# Altium PCB TIMER_COUNTER_MAIN.PcbDoc
Units mm, origin at the board's own origin, x right, y up, seen from the top; angles counter-clockwise.
Board outline 50 x 50 mm, 2 copper layers (Top Layer, Bottom Layer); 63 components, 52 nets, 194 pads, 122 vias.
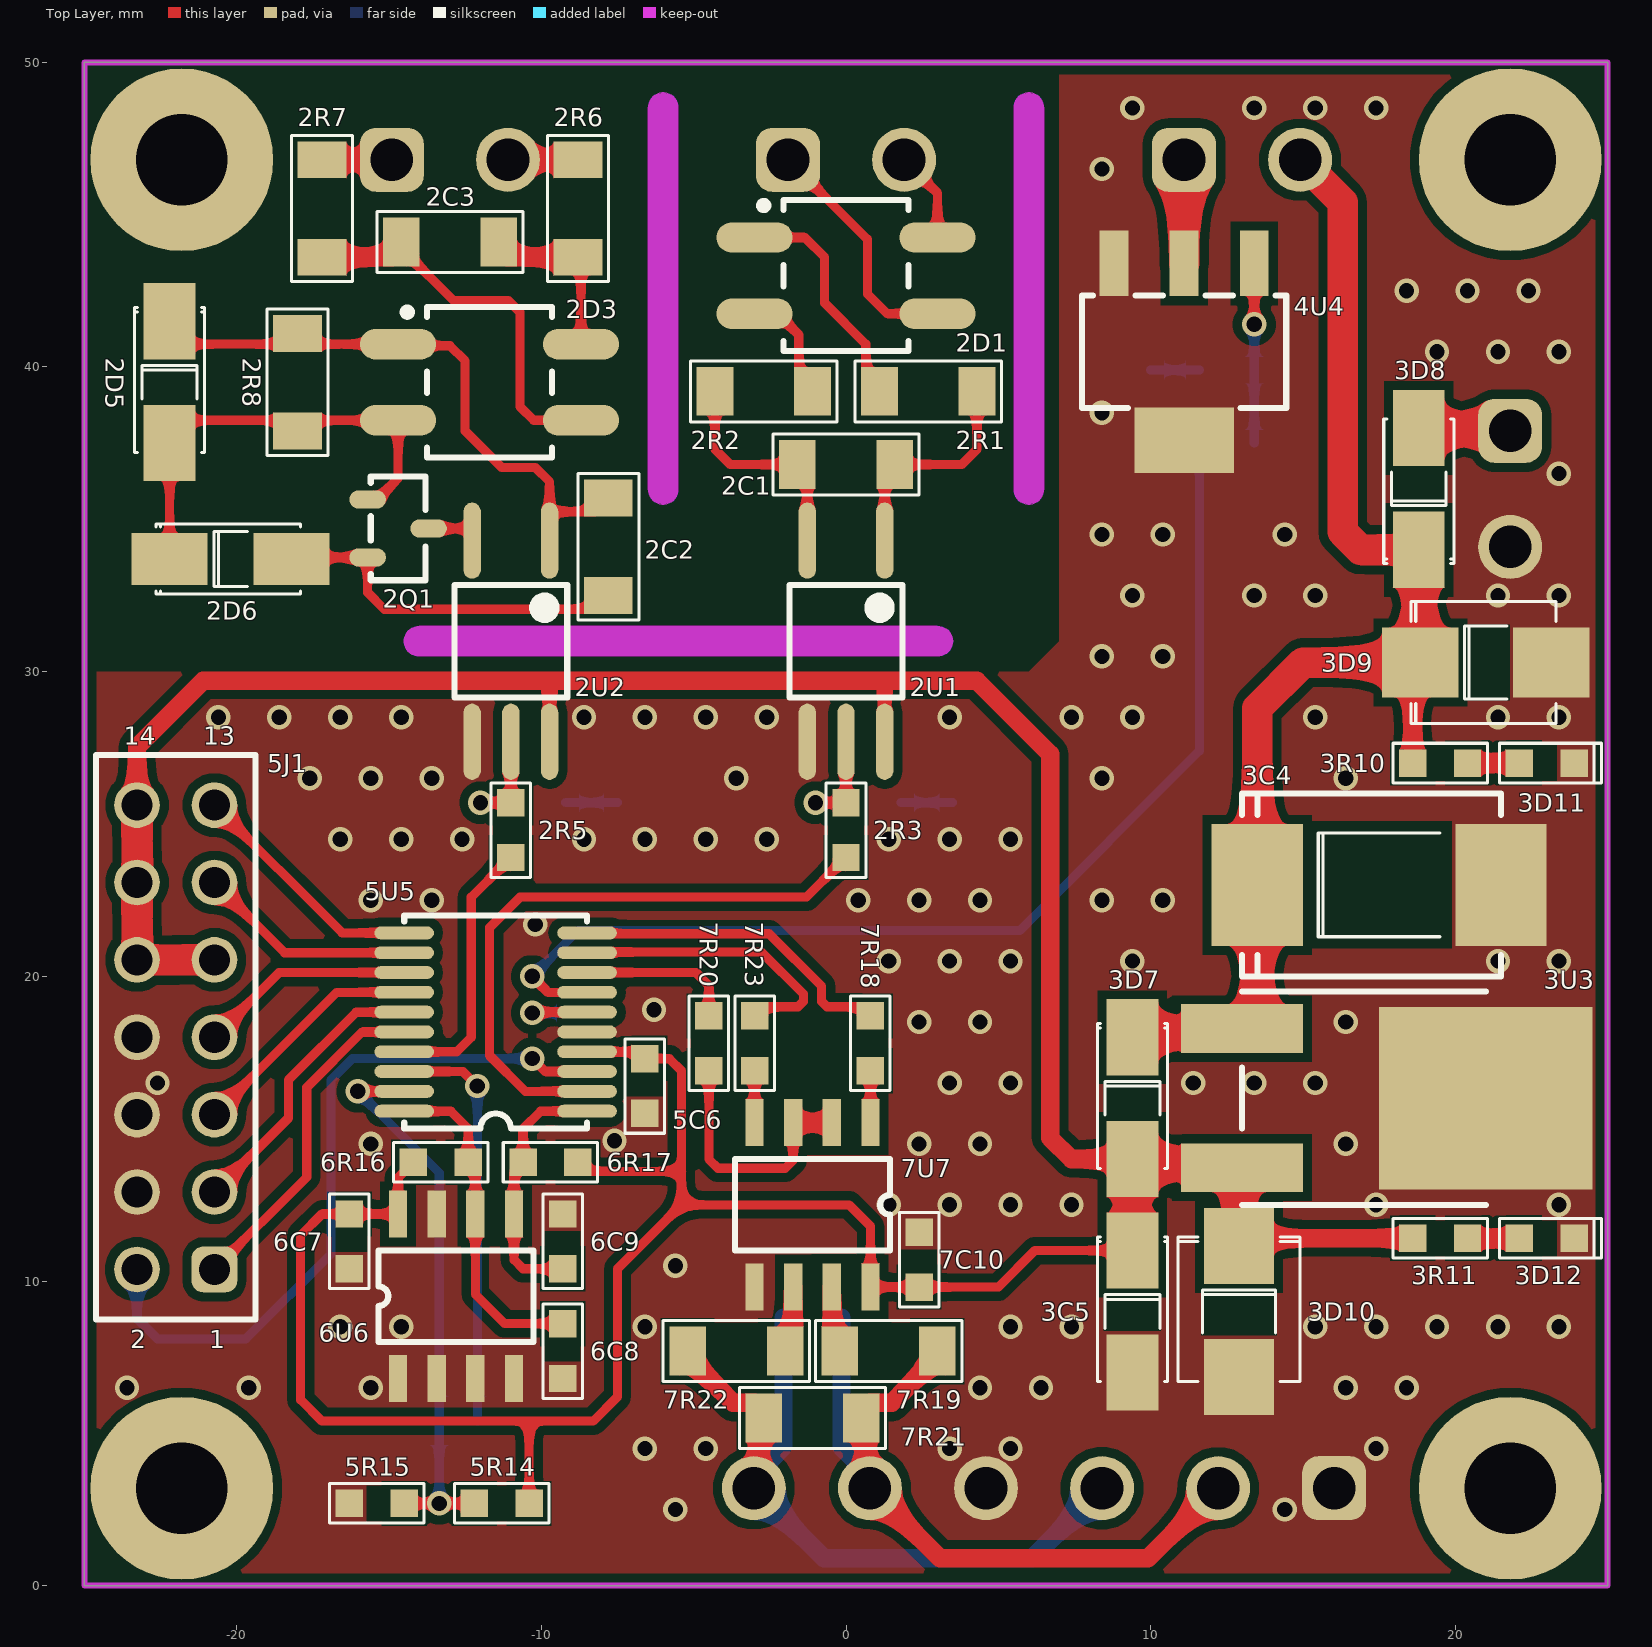
[diagram p0: Top Layer view]
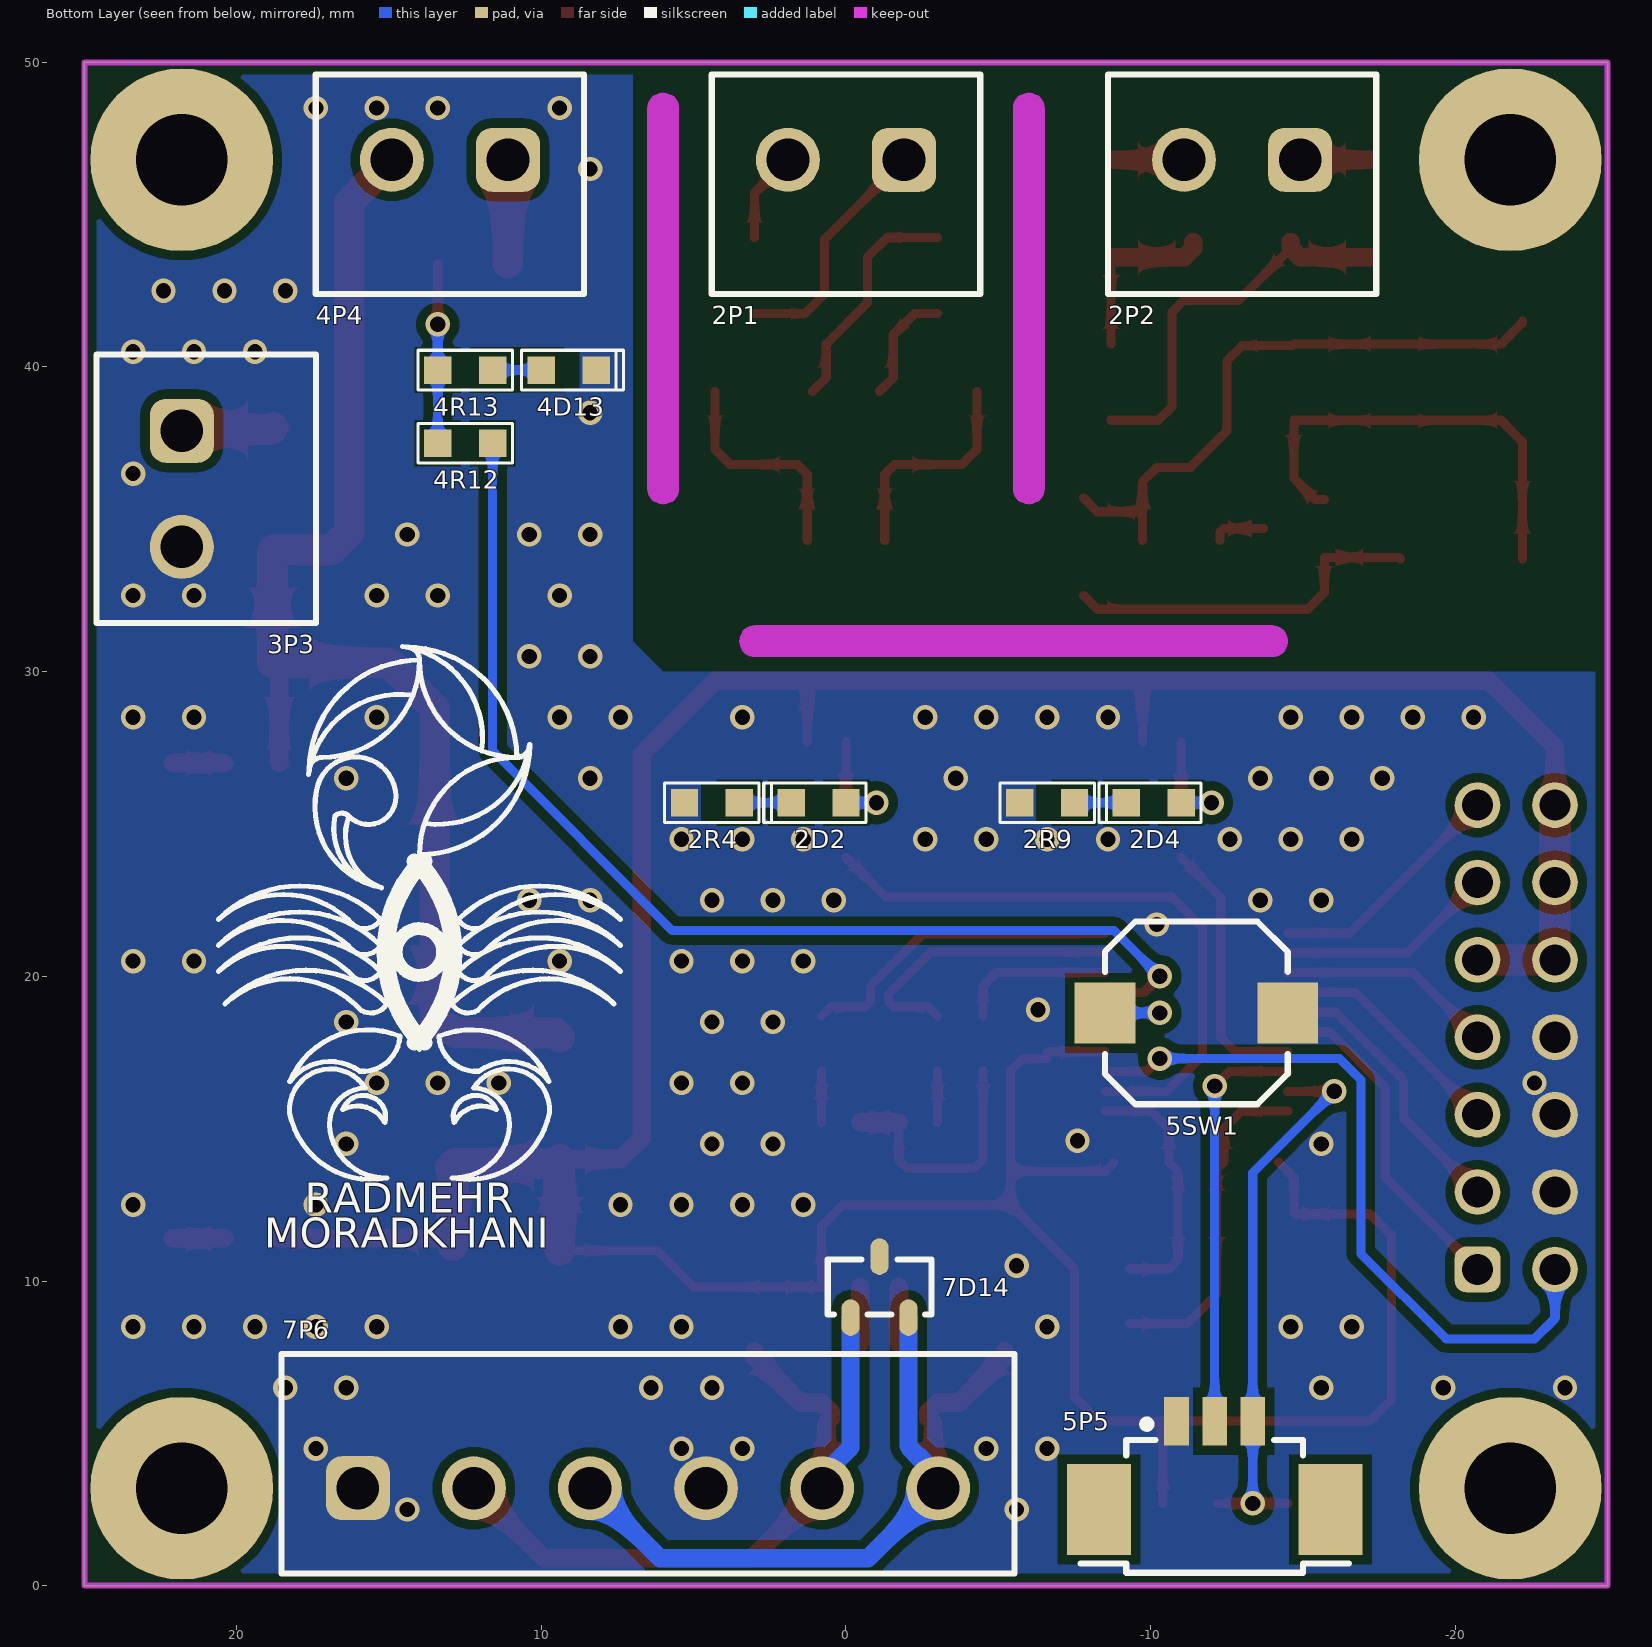
[diagram p1: Bottom Layer view, seen from below]
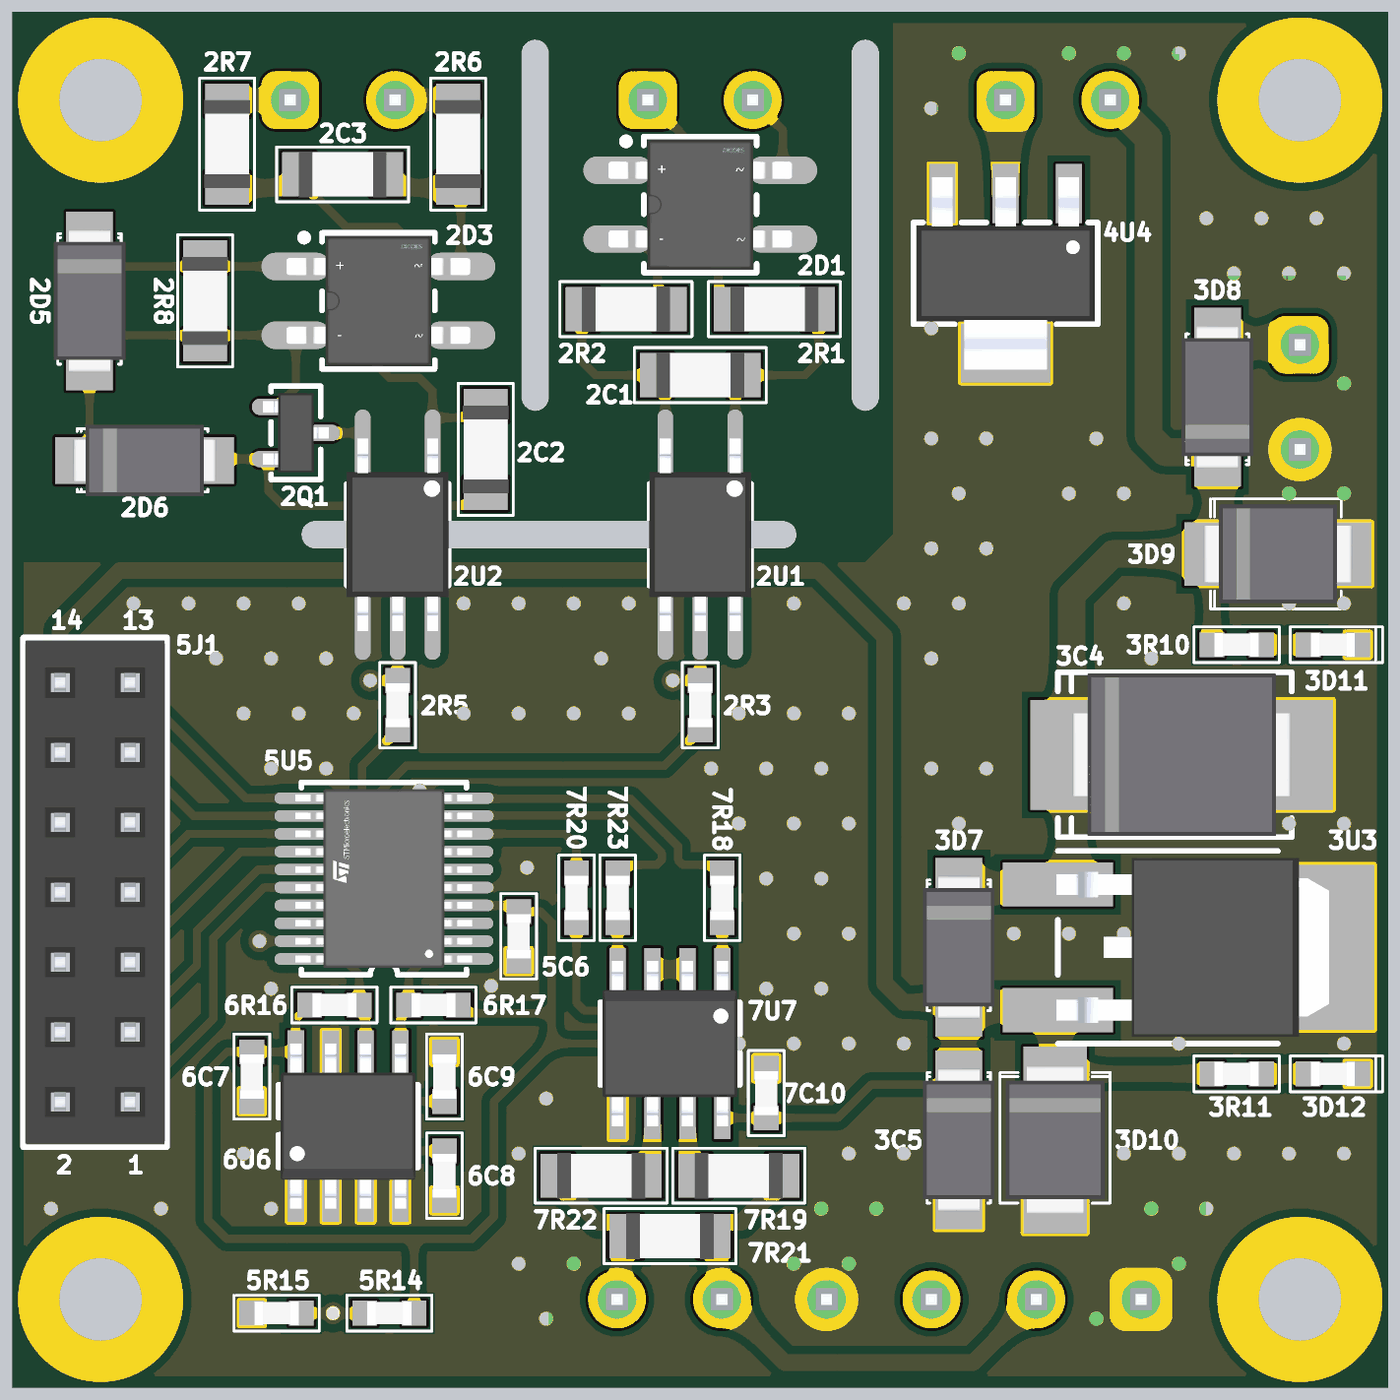
[diagram p2: 3D render of the assembled board from above, using the file's embedded part models]
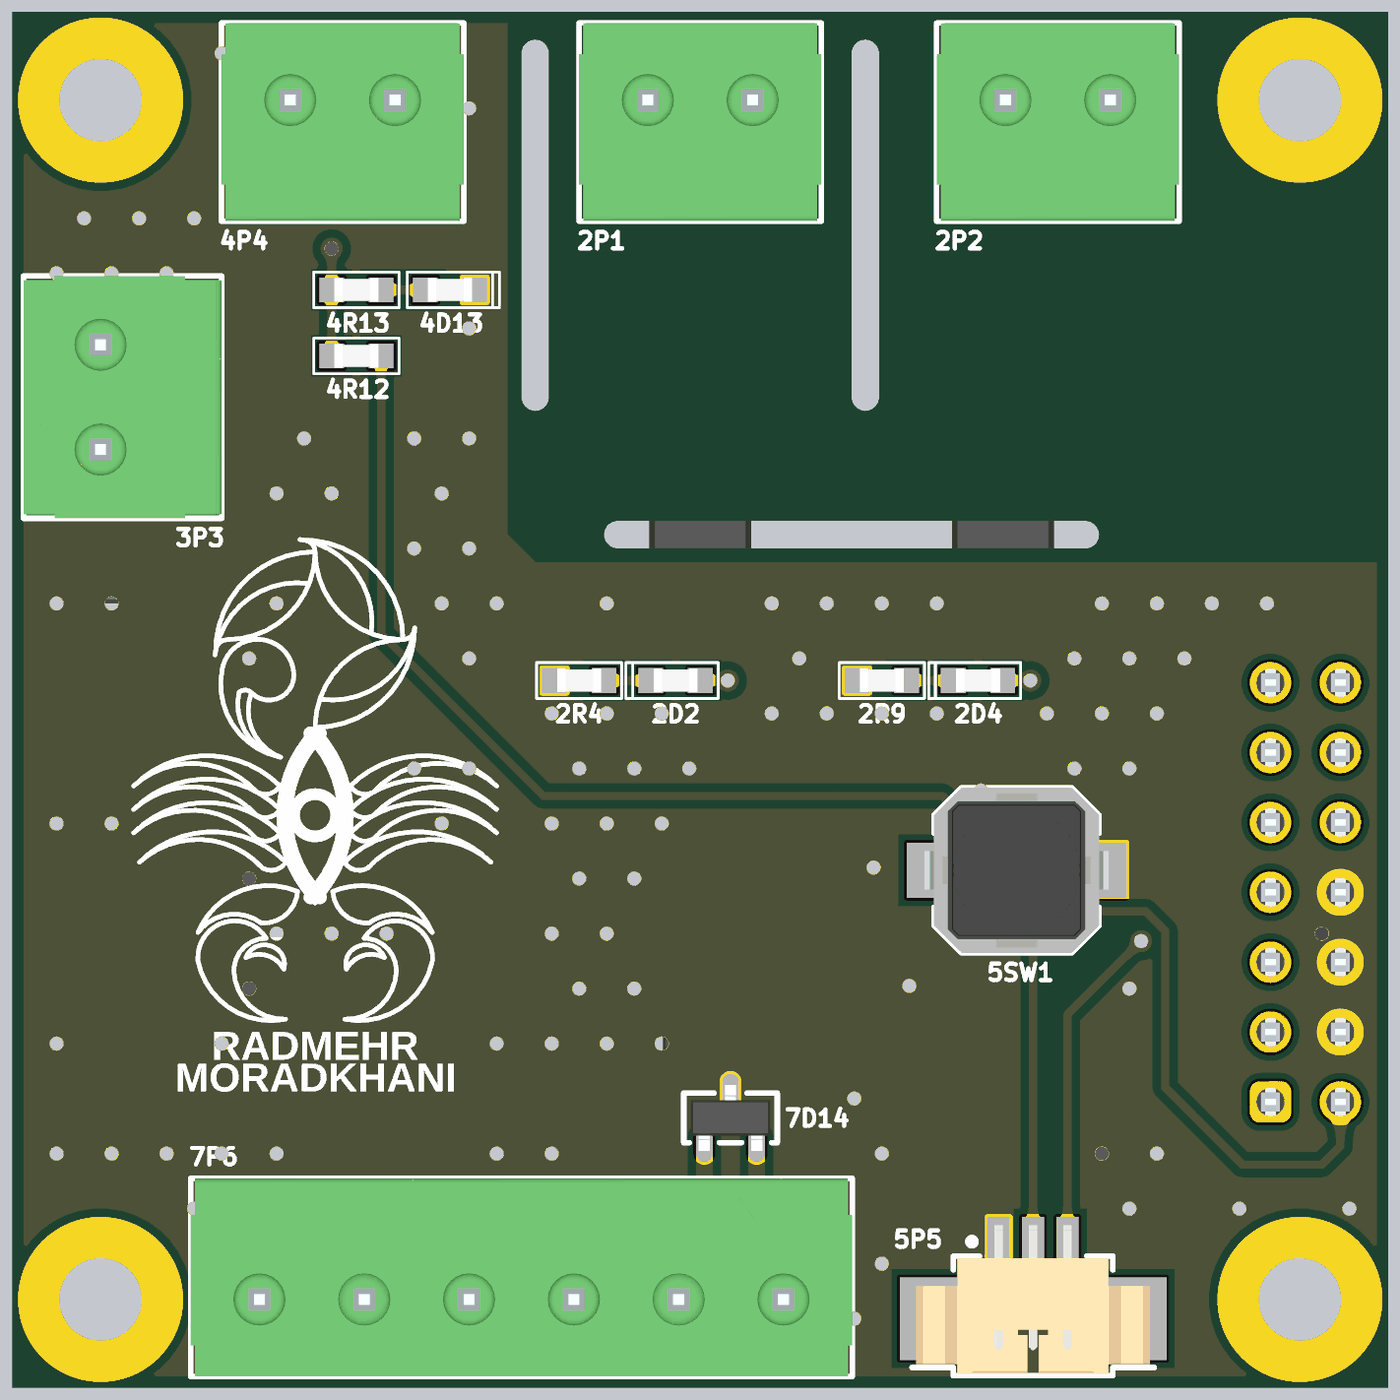
[diagram p3: 3D render of the assembled board from below, using the file's embedded part models]

## Layer stack, top to bottom
Top Solder: solder mask 0.0102, Solder Resist, Dk 3.5
Top Layer: signal copper 0.0356
Dielectric 1: dielectric 0.32, FR-4, Dk 4.8
Bottom Layer: signal copper 0.0356
Bottom Solder: solder mask 0.0102, Solder Resist, Dk 3.5

## Board outline
-25,0 -25,50 25,50 25,0
cut-out: 5.5,36 ccw(c6,36) 6.5,36 6.5,48.5 ccw(c6,48.5) 5.5,48.5
cut-out: -6.5,36 ccw(c-6,36) -5.5,36 -5.5,48.5 ccw(c-6,48.5) -6.5,48.5
cut-out: -14,30.5 cw(c-14,31) -14,31.5 3,31.5 cw(c3,31) 3.5,31 cw(c3,31) 3,30.5

## Design rules (kind name [scope] priority, off if disabled: settings)
Clearance [All] p1: gap=0.3 ignorepadtopadclearanceinfootprint=FALSE except(0: Arc-Hole Track-Hole SMDPad-Hole THPad-Hole Via-Hole Fill-Hole Poly-Hole Region-Hole Text-Hole)
DiffPairsRouting [All] p1: maxlimit=0.3 minlimit=0.3 mostfreqgap=0.3 toplayer_minwidth=0.3 toplayer_maxwidth=0.3 toplayer_prefwidth=0.3 bottomlayer_minwidth=0.3 bottomlayer_maxwidth=0.3 bottomlayer_prefwidth=0.3 maxuncoupledlength=12.7
PlaneClearance [All] p1: clearance=0.5
PlaneConnect [All] p1: planeconnectstyle=Direct reliefexpansion=0.5 reliefentries=4 reliefconductorwidth=0.3 reliefairgap=0.3
PolygonConnect [All] p1: connectstyle=Direct reliefconductorwidth=0.254 reliefentries=4 polygonreliefangle="90 Angle" airgapwidth=0.254
RoomDefinition SSR [InComponentClass('SSR')] p1: confinementstyle=ConfineIn formatcopy=TRUE lockcomponents=FALSE outline -109.6,-53.5 -58.8,-53.5 -58.8,-28.1 -109.6,-28.1
RoomDefinition RS485 [InComponentClass('RS485')] p2: confinementstyle=ConfineIn formatcopy=TRUE lockcomponents=FALSE outline -109.6,-53.5 -58.8,-53.5 -58.8,-28.1 -109.6,-28.1
RoomDefinition POWER_SUPPLY [InComponentClass('POWER_SUPPLY')] p3: confinementstyle=ConfineIn formatcopy=TRUE lockcomponents=FALSE outline -109.6,-53.5 -58.8,-53.5 -58.8,-28.1 -109.6,-28.1
RoomDefinition MCU [InComponentClass('MCU')] p4: confinementstyle=ConfineIn formatcopy=TRUE lockcomponents=FALSE outline -109.6,-53.5 -58.8,-53.5 -58.8,-28.1 -109.6,-28.1
RoomDefinition ISO [InComponentClass('ISO')] p5: confinementstyle=ConfineIn formatcopy=TRUE lockcomponents=FALSE outline -109.6,-53.5 -58.8,-53.5 -58.8,-28.1 -109.6,-28.1
RoomDefinition EEP [InComponentClass('EEP')] p6: confinementstyle=ConfineIn formatcopy=TRUE lockcomponents=FALSE outline -109.6,-53.5 -58.8,-53.5 -58.8,-28.1 -109.6,-28.1
RoutingVias [All] p1: holewidth=0.5 width=0.8 viastyle="Through Hole" minholewidth=0.5 minwidth=0.8 maxholewidth=0.5 maxwidth=0.8
SolderMaskExpansion [All] p1: expansion=0.102 istentingtop=FALSE
Width [All] p1: maxlimit=1 minlimit=0.3 preferedwidth=0.6
27 further rules are at their usual default settings.

## Classes and differential pairs
component class SSR: 4D13 4P4 4R12 4R13 4U4
component class RS485: 7C10 7D14 7P6 7R18 7R19 7R20 7R21 7R22 7R23 7U7
component class POWER_SUPPLY: 3C4 3C5 3D7 3D8 3D9 3D10 3D11 3D12 3P3 3R10 3R11 3U3
component class ISO: 2C1 2C2 2C3 2D1 2D2 2D3 2D4 2D5 2D6 2P1 2P2 2Q1 2R1 2R2 2R3 2R4 2R5 2R6 2R7 2R8 2R9 2U1 2U2
component class EEP: 6C7 6C8 6C9 6R16 6R17 6U6
component class MCU: 5C6 5J1 5P5 5R14 5R15 5SW1 5U5
differential pair USRT: +USRT_P -USRT_N

## Components (designator, comment, footprint, x,y, rotation, side; value= is the part's Value field where it differs from the comment)
2C1 "CAP_SMD" "C 1206" 0,36.8 r0 top (schematic designator C1)
2C2 "CAP_SMD" "C 1206" -7.8,34.1 r270 top (schematic designator C2)
2C3 "CAP_SMD" "C 1206" -13,44.1 r0 top (schematic designator C3)
2D1 "MB10F" MBF 0,43 r0 top (schematic designator D1)
2D2 "LED_SMD" "D 0603" 0.9,25.7 r0 bottom (schematic designator D2)
2D3 "MB10F" MBF -11.7,39.5 r0 top (schematic designator D3)
2D4 "LED_SMD" "D 0603" -10.1,25.7 r0 bottom (schematic designator D4)
2D5 "DIOD_SMD_ZENER" DIOD_SMA -22.2,39.5 r90 top (schematic designator D5)
2D6 "DIOD_SMD" DIOD_SMA -20.2,33.7 r180 top (schematic designator D6)
2P1 "691321300002" 691321300002 0,46 r0 bottom (schematic designator P1)
2P2 "691321300002" 691321300002 -13,46 r0 bottom (schematic designator P2)
2Q1 "BC817" SOT-23_3_Q -14.7,34.7 r0 top (schematic designator Q1)
2R1 "RES_SMD" "R 1206" 2.7,39.2 r0 top (schematic designator R1)
2R2 "RES_SMD" "R 1206" -2.7,39.2 r180 top (schematic designator R2)
2R3 "RES_SMD" "R 0603" 0,24.8 r90 top (schematic designator R3)
2R4 "RES_SMD" "R 0603" 4.4,25.7 r180 bottom (schematic designator R4)
2R5 "RES_SMD" "R 0603" -11,24.8 r90 top (schematic designator R5)
2R6 "RES_SMD" "R 1206" -8.8,45.2 r270 top (schematic designator R6)
2R7 "RES_SMD" "R 1206" -17.2,45.2 r270 top (schematic designator R7)
2R8 "RES_SMD" "R 1206" -18,39.5 r90 top (schematic designator R8)
2R9 "RES_SMD" "R 0603" -6.6,25.7 r180 bottom (schematic designator R9)
2U1 "TLP2355" SOIC-6-5 0,31 r270 top (schematic designator U1)
2U2 "TLP2355" SOIC-6-5 -11,31 r270 top (schematic designator U2)
3C4 "CAP_POL" CAP_SMC 17.5,23 r180 top (schematic designator C4)
3C5 "CAP_POL" CAP_SMA 9.4,9 r90 top (schematic designator C5)
3D7 "DIOD_SMD" DIOD_SMA 9.4,16 r90 top (schematic designator D7)
3D8 "DIOD_SMD" DIOD_SMA 18.8,36 r270 top (schematic designator D8)
3D9 "TVS_BI" DIOD_SMB 21,30.3 r180 top (schematic designator D9)
3D10 "TVS_BI" DIOD_SMB 12.9,9 r90 top (schematic designator D10)
3D11 "LED_SMD" "D 0603" 23,27 r0 top (schematic designator D11)
3D12 "LED_SMD" "D 0603" 23,11.4 r0 top (schematic designator D12)
3P3 "691321300002" 691321300002 21,36 r270 bottom (schematic designator P3)
3R10 "RES_SMD" "R 0603" 19.5,27 r180 top (schematic designator R10)
3R11 "RES_SMD" "R 0603" 19.5,11.4 r180 top (schematic designator R11)
3U3 "BD3570FP-E2" DPAK-U 17,16 r180 top (schematic designator U3)
4D13 "LED_SMD" "D 0603" 9.1,39.9 r180 bottom (schematic designator D13)
4P4 "691321300002" 691321300002 13,46 r0 bottom (schematic designator P4)
4R12 "RES_SMD" "R 0603" 12.5,37.5 r180 bottom (schematic designator R12)
4R13 "RES_SMD" "R 0603" 12.5,39.9 r0 bottom (schematic designator R13)
4U4 "BSP75N" "SOT-223 - BSP75N" 11.1,40.5 r180 top (schematic designator U4)
5C6 "CAP_SMD" "C 0603" -6.6,16.4 r90 top (schematic designator C6)
5J1 "61301421821" 61301421821 -22,18 r90 top locked (schematic designator J1)
5P5 "653103131822" 653103131822 -12.1,2.6 r180 bottom (schematic designator P5)
5R14 "RES_SMD" "R 0603" -11.3,2.7 r0 top (schematic designator R14)
5R15 "RES_SMD" "R 0603" -15.4,2.7 r0 top (schematic designator R15)
5SW1 "430133050816" WS-TASV_L6W6H5_4301330508x6 -11.5,18.8 r0 bottom (schematic designator SW1)
5U5 "STM32G030F6" TSSOP-20 -11.5,18.5 r180 top (schematic designator U5)
6C7 "CAP_SMD" "C 0603" -16.3,11.3 r90 top (schematic designator C7)
6C8 "CAP_SMD" "C 0603" -9.3,7.7 r90 top (schematic designator C8)
6C9 "CAP_SMD" "C 0603" -9.3,11.3 r270 top (schematic designator C9)
6R16 "RES_SMD" "R 0603" -13.3,13.9 r180 top (schematic designator R16)
6R17 "RES_SMD" "R 0603" -9.7,13.9 r0 top (schematic designator R17)
6U6 "AT24CXX" SOIC-8 -12.8,9.5 r90 top (schematic designator U6)
7C10 "CAP_SMD" "C 0603" 2.4,10.7 r270 top (schematic designator C10)
7D14 "SM712" SOT-23_3_D -1.1,9.8 r90 bottom (schematic designator D14)
7P6 "691321300006" 691321300006 6.5,4 r180 bottom (schematic designator P6)
7R18 "RES_SMD" "R 0603" 0.8,17.8 r270 top (schematic designator R18)
7R19 "10R" "R 1206" 1.4,7.7 r0 top (schematic designator R19)
7R20 "RES_SMD" "R 0603" -4.5,17.8 r270 top (schematic designator R20)
7R21 "120R" "R 1206" -1.1,5.5 r180 top (schematic designator R21)
7R22 "10R" "R 1206" -3.6,7.7 r180 top (schematic designator R22)
7R23 "RES_SMD" "R 0603" -3,17.8 r270 top (schematic designator R23)
7U7 "ADM3485" SOIC-8 -1.1,12.5 r270 top (schematic designator U7)

## Footprints (in the part's own frame and the unit in brackets; to place one, negate y for a bottom-side part, rotate by r counter-clockwise, add the part's x,y. Pads: shape width x height; smd on the part's side, far side on the other; paste and mask are expansions set on the pad)
61301421821 [mm] "Socket Header, Pitch 2.54 mm, THT, Vertical, dual row, 14p"
  rrect50% 1.5x1.5 hole 1.02: 1(-7.62,-1.27)
  round 1.5 hole 1.02: 2(-7.62,1.27) 3(-5.08,-1.27) 4(-5.08,1.27) 5(-2.54,-1.27) 6(-2.54,1.27) 7(0,-1.27) 8(0,1.27) 9(2.54,-1.27) 10(2.54,1.27) 11(5.08,-1.27) 12(5.08,1.27) 13(7.62,-1.27) 14(7.62,1.27)
  silkscreen extent -9.27,-2.62 9.27,2.62, body extent -9.14,-2.54 9.14,2.54, height 8.45
653103131822 [mm] "1.25mm SMT Male Horizontal Shrouded Header, 3p"
  rect 0.81x1.6 smd: 1(-1.25,2.8) 2(0,2.8) 3(1.25,2.8)
  rect 2.1x3 smd: MP1(-3.8,-0.1) MP2(3.8,-0.1)
  silkscreen extent -4.4,-2.17 4.4,2.82, body extent -4.25,-2.1 4.25,3.3, height 3.4
691321300002 [mm] "Vertical PCB Header, pitch 3.81mm, 02p"
  rrect50% 2.1x2.1 hole 1.4: 1(-1.905,-0.8)
  round 2.1 hole 1.4: 2(1.905,-0.8)
  silkscreen extent -4.4,-3.6 4.41,3.6, body extent -4.4,-3.6 4.41,3.6, height 9.25
691321300006 [mm] "Vertical PCB Header, pitch 3.81mm, 06p"
  rrect50% 2.1x2.1 hole 1.4: 1(-9.525,-0.8)
  round 2.1 hole 1.4: 2(-5.715,-0.8) 3(-1.905,-0.8) 4(1.905,-0.8) 5(5.715,-0.8) 6(9.525,-0.8)
  silkscreen extent -12.02,-3.6 12.03,3.6, body extent -12.02,-3.6 12.03,3.6, height 9.25
"C 0603" [mm] "C?"
  rect 0.9x0.9 smd: 1(-0.9,0) 2(0.9,0)
  Top Layer pour cut-out: -0.35,0.6 0.35,0.6 0.35,-0.6 -0.35,-0.6
  silkscreen extent -1.55,-0.65 1.55,0.65, body extent -0.8,-0.43 0.8,0.43, height 0.52
"C 1206" [mm] "C?"
  rect 1.2x1.6 smd: 1(-1.6,0) 2(1.6,0)
  Top Layer pour cut-out: -0.9,0.95 0.9,0.95 0.9,-0.95 -0.9,-0.95
  silkscreen extent -2.4,-1 2.4,1, body extent -1.6,-0.83 1.6,0.83, height 0.57
CAP_SMA [mm] "C?"
  rect 2.5x1.7 smd: 1(-2,0) 2(2,0)
  Top Layer pour cut-out: -0.65,0.95 0.65,0.95 0.65,-0.95 -0.65,-0.95
  silkscreen extent -2.3,-1.15 2.45,1.15, body extent -2.6,-1.3 2.6,1.3, height 2.42
CAP_SMC [mm] "C?"
  rect 3x4 smd: 1(-4,0) 2(4,0)
  Top Layer pour cut-out: -2.4,2.1 2.4,2.1 2.4,-2.1 -2.4,-2.1
  silkscreen extent -4,-3 4.5,3, body extent -3.97,-2.95 3.98,2.95, height 2.32
"D 0603" [mm] "D?"
  rect 0.9x0.9 smd: 1(-0.9,0) 2(0.9,0)
  Top Layer pour cut-out: -0.35,0.6 0.35,0.6 0.35,-0.6 -0.35,-0.6
  silkscreen extent -1.55,-0.65 1.8,0.65, body extent -0.8,-0.43 0.8,0.43, height 0.52
DIOD_SMA [mm] "D?"
  rect 2.5x1.7 smd: 1(-2,0) 2(2,0)
  Top Layer pour cut-out: -0.65,0.95 0.65,0.95 0.65,-0.95 -0.65,-0.95
  silkscreen extent -2.3,-1.15 2.45,1.15, body extent -2.6,-1.3 2.6,1.3, height 2.42
DIOD_SMB [mm] "D?"
  rect 2.5x2.3 smd: 1(-2.15,0) 2(2.15,0)
  Top Layer pour cut-out: -0.8,1.25 0.8,1.25 0.8,-1.25 -0.8,-1.25
  silkscreen extent -2.3,-2 2.45,2, body extent -2.7,-1.8 2.7,1.8, height 2.32
DPAK-U [mm] "U?"
  rect 4x1.6 smd: 1(4,-2.285) 3(4,2.285)
  rect 7x6 smd: 2(-4,0)
  silkscreen extent -4,-3.5 4,3.5, body extent -5.85,-3.25 4.05,3.25, height 2.51
MBF [mm] "D?"
  oval 2.5x1 smd paste+0 mask+0: 1(-3,1.25) 2(-3,-1.25) 3(3,-1.25) 4(3,1.25)
  silkscreen extent -2.82,-2.47 2.05,2.47, body extent -3.35,-2.36 3.35,2.36, height 1.8
"R 0603" [mm] "R?"
  rect 0.9x0.9 smd: 1(-0.9,0) 2(0.9,0)
  Top Layer pour cut-out: -0.35,0.6 0.35,0.6 0.35,-0.6 -0.35,-0.6
  silkscreen extent -1.55,-0.65 1.55,0.65, body extent -0.8,-0.43 0.8,0.43, height 0.52
"R 1206" [mm] "R?"
  rect 1.2x1.6 smd: 1(-1.6,0) 2(1.6,0)
  Top Layer pour cut-out: -0.9,0.95 0.9,0.95 0.9,-0.95 -0.9,-0.95
  silkscreen extent -2.4,-1 2.4,1, body extent -1.6,-0.83 1.6,0.83, height 0.57
SOIC-6-5 [mm] "U?"
  oval 2.5x0.571 smd paste+0 mask+0: 1(-3.3,1.27)
  rrect100% 2.5x0.571 smd paste+0 mask+0: 3(-3.3,-1.27) 4(3.3,-1.27) 5(3.3,0) 6(3.3,1.27)
  silkscreen extent -1.85,-1.85 1.85,1.85, body extent -3.5,-1.85 3.5,1.85, height 2.31
SOIC-8 [mm] "U?"
  rect 1.55x0.6 smd: 1(-2.7,1.905) 2(-2.7,0.635) 3(-2.7,-0.635) 4(-2.7,-1.905) 5(2.7,-1.905) 6(2.7,-0.635) 7(2.7,0.635) 8(2.7,1.905)
  silkscreen extent -1.5,-2.54 1.5,2.54, body extent -3,-2.45 3,2.45, height 1.75
SOT-23_3_D [mm] "D?"
  oval 1.2x0.6 smd: 1(-1,0.95) 2(-1,-0.95) 3(1,0)
  silkscreen extent -0.9,-1.7 0.9,1.7, body extent -1.2,-1.45 1.2,1.45, height 1.16
SOT-23_3_Q [mm] "Q?"
  oval 1.2x0.6 smd: 1(-1,0.95) 2(-1,-0.95) 3(1,0)
  silkscreen extent -0.9,-1.7 0.9,1.7, body extent -1.2,-1.45 1.2,1.45, height 1.16
"SOT-223 - BSP75N" [mm] "U?"
  rect 0.95x2.15 smd: 1(-2.3,-2.9) 2(0,-2.9) 3(2.3,-2.9)
  rect 3.255x2.15 smd: 3(0,2.9)
  silkscreen extent -3.35,-1.85 3.35,1.85, body extent -3.25,-3.5 3.25,3.5, height 1.8
TSSOP-20 [mm] "U?"
  oval 1.955x0.421 smd paste+0 mask+0.01: 1(-3,2.925) 2(-3,2.275) 3(-3,1.625) 4(-3,0.975) 5(-3,0.325) 6(-3,-0.325) 7(-3,-0.975) 8(-3,-1.625) 9(-3,-2.275) 10(-3,-2.925)
  oval 1.955x0.421 smd paste+0 mask+0: 11(3,-2.925) 12(3,-2.275) 13(3,-1.625) 14(3,-0.975) 15(3,-0.325) 16(3,0.325) 17(3,0.975) 18(3,1.625) 19(3,2.275) 20(3,2.925)
  silkscreen extent -3,-3.5 3,3.5, body extent -4.35,-3.75 4.35,3.75, height 0.25
WS-TASV_L6W6H5_4301330508x6 [mm] "Tact Switch, SMT, body 6x6mm"
  rect 2x2 smd: 1(-3,0) 2(3,0)
  silkscreen extent -3,-3 3,3, body extent -3.35,-3 3.35,3, height 5

## Part data
2P1 2P2 3P3 4P4: "WR-TBL Series 321 Vertical PCB Header, Through Hole, pitch 3.81mm, 2p", Manufacturer="Wurth Elektronik", Operating Temperature Max=105°C, Operating Temperature Min=-40°C, Rated Current=10A, Working Voltage=300V, Application=Pluggable, Category="Terminal Blocks", ComponentLink1Description="Manufacturer Link", ComponentLink1URL=https://www.we-online.com/redexpert/article/691321300002?ad, ComponentLink2Description=Datasheet, ComponentLink2URL=https://www.we-online.com/redexpert/spec/691321300002?ad, Manufacturer Part Number=691321300002, Match Code=WR-TBL, Modularity=No, Mount="Through Hole", Orientation=Vertical, Packaging=Box, PCB/Cable/Panel=PCB, Pin Number=2, Pitch=3.81mm
3D9 3D10: library part DIOD_SMD_TVS_BI
5J1: "WR-PHD Socket Header, THT, pitch 2.54mm, Dual Row, Vertical, 14p", Contact Resistance=20mOhm, Manufacturer="Wurth Elektronik", Operating Temperature="-40 to +125degC", Rated Current=3A, Withstanding Voltage=500VAC, Working Voltage=250VAC, ComponentLink1Description=Manufacturer, ComponentLink1URL=http://www.we-online.de, ComponentLink2Description=Datasheet, ComponentLink2URL=https://www.we-online.com/catalog/datasheet/61301421821.pdf, Gender="Socket Header", Manufacturer Part Number=61301421821, Mounting Technology=THT, Orientation=Vertical, Packaging=Tray, Pin Number=14, Pitch=2.54mm, Row Number=Dual
5P5: "WR-WTB SMT Male Horizontal Shrouded Header, pitch 1.25mm, 3p", Contact Resistance=20mOhm, Operating Temperature="-40 to +85degC", Rated Current=1A, Withstanding Voltage=250VAC, Working Voltage=125VAC, ComponentLink1Description=Manufacturer, ComponentLink1URL=http://www.we-online.de, ComponentLink2Description=Datasheet, ComponentLink2URL=https://www.we-online.com/catalog/datasheet/653103131822.pdf, Gender=Male, Mounting Technology=SMT, Packaging="Tape and Reel", Part Number=653103131822, Pin Number=3, Pitch=1.25mm, Published Date="January 2020", Publisher="Wurth Elektronik", Type=Horizontal
5SW1: "WS-TASV SMT long travel tact switch, L6 x W6 x H5mm, 160g, SPST-NO, 16V, 50mA", Manufacturer="Wurth Elektronik", Operating Temperature Max=125°C, Operating Temperature Min=-40°C, Rated Current=50mA, Rated Voltage (DC)=16V, Category="Tact Switches", Circuit=SPST-NO, ComponentLink1Description="Website Link", ComponentLink1URL=https://www.we-online.com/redexpert/article/430133050816?ad, ComponentLink2Description="Datasheet Link", ComponentLink2URL=https://www.we-online.com/redexpert/spec/430133050816?ad, Contact Material="Stainless Steel", Contact Plating=Silver, Height=5mm, Length=6mm, Manufacturer Part Number=430133050816, Match Code=WS-TASV, Mount="Surface Mount", Operation Force=160g, Packaging="Tape and Reel", Terminal Material="Copper Alloy", Terminal Plating=Silver, Washable=No, Width=6mm
7P6: "WR-TBL Series 321 Vertical PCB Header, Through Hole, pitch 3.81mm, 6p", Manufacturer="Wurth Elektronik", Operating Temperature Max=105°C, Operating Temperature Min=-40°C, Rated Current=10A, Working Voltage=300V, Application=Pluggable, Category="Terminal Blocks", ComponentLink1Description="Manufacturer Link", ComponentLink1URL=https://www.we-online.com/redexpert/article/691321300006?ad, ComponentLink2Description=Datasheet, ComponentLink2URL=https://www.we-online.com/redexpert/spec/691321300006?ad, Manufacturer Part Number=691321300006, Match Code=WR-TBL, Modularity=No, Mount="Through Hole", Orientation=Vertical, Packaging=Box, PCB/Cable/Panel=PCB, Pin Number=6, Pitch=3.81mm
7R19 7R21 7R22: library part RES_SMD, "RES_SMD"

## Free pads (board coordinates)
  round 6 hole 3 mask+0: ""(-21.8,3.2) ""(-21.8,46.8) ""(21.8,3.2) ""(21.8,46.8)

## Via types
v1: diameter 0.8/0.8 (per signal layer), hole 0.5, Top Layer to Bottom Layer, tented both sides, 110 vias
v2: diameter 0.8, hole 0.5, Top Layer to Bottom Layer, tented both sides, 12 vias

## Nets (pads, with @x,y where several pads share a name; then routed paths per layer and width w, separated by ;. In a path a pad name is that pad's centre, name@x,y a point inside that pad or via, vN(x,y) a via of type N, cw(c..) or ccw(c..) an arc to the next point about the centre after c; other vN are vias at no path point)
+3V3: 2U1.6 2U2.6 3C5.2 3D7.1 3D10.2 3R11.2 3U3.3 5C6.2 5J1.9 5J1.10 5J1.12 5J1.14 5R14.2 5U5.4 6C7.2 6R16.2 6R17.2 6U6.8 7C10.2 7U7.8 | length 136.6
  Top Layer w0.3: 6R16.2 -14.705,13.395 6U6.8 6C7.2 -17.2,12.2 -17.9,11.5 -17.9,6.1 -17.2,5.4 -10.4,5.4 ; 5R14.2 -10.4,5.4 ; 2U2.6 -9.73,29.7 ; 6R17.2 -8.5,13.6 -5.4,13.6 ; 5U5.4 -6.625,17.525 5C6.2@-6.6,17.5 ; 5C6.2 -5.8,17.3 -5.4,16.9 -5.4,13.6 ; 2U1.6 1.27,29.7 ; 3C5.2 6.2,11 5,9.8 7C10.2 7U7.8 0.805,11.795 0.1,12.5 -5.4,12.5 ; -10.4,5.4 -8.3,5.4 -7.5,6.2 -7.5,10.4 -5.4,12.5 ; -5.4,12.5 -5.4,13.6
  Top Layer w0.6: 5J1.14 -23.27,27.53 -21.1,29.7 -9.73,29.7 1.27,29.7 4.3,29.7 6.7,27.3 6.7,14.7 7.4,14 3D7.1 ; 3D10.2 13.15,11.4 3R11.2
  Top Layer w1: 5J1.14 5J1.12 5J1.10 5J1.9 ; 3C5.2 3D7.1 9.542,13.858 12.858,13.858 3U3.3 12.9,13.615 3D10.2
+24V0: 3C4.2 3D7.2 3D8.2 3D9.2 3R10.2 3U3.1 4P4.2 | length 43.2
  Top Layer w0.6: 3R10.2 18.6,30.05 3D9.2
  Top Layer w1: 3D7.2 9.542,18.143 12.858,18.143 3U3.1 13.2,18.285 13.5,18.585 3C4.2 13.5,28.8 15,30.3 3D9.2 18.825,30.325 18.825,33.975 3D8.2 16.886,34 16.3,34.586 16.3,45.405 4P4.2
A: 7D14.2 7P6.3 7P6.6 7R21.2 7R22.2 | length 25.4
  Top Layer w0.6: 7R22.2 -5.2,7.5 -3.7,6 -3,6 -2.7,5.7 7R21.2 -2.863,5.337 -2.863,3.362 7P6.6
  Bottom Layer w0.6: 7D14.2 -2.05,4.581 -3.025,3.606 7P6.6 -0.725,0.9 6.105,0.9 7P6.3
B: 7D14.1 7P6.2 7P6.5 7R19.2 7R21.1 | length 25.4
  Top Layer w0.6: 7R19.2 3,7.5 1.5,6 0.8,6 0.5,5.7 7R21.1 0.642,5.358 0.642,3.342 7P6.5 3.085,0.9 9.915,0.9 7P6.2
  Bottom Layer w0.6: 7D14.1 -0.15,4.541 0.785,3.606 7P6.5
ENC_A: 5J1.7 5U5.13 | length 7.1
  Top Layer w0.3: 5J1.7 -18.605,20.125 5U5.13
ENC_B: 5J1.5 5U5.14 | length 7.9
  Top Layer w0.3: 5J1.5 -16.715,19.475 5U5.14
ENC_S: 5J1.3 5U5.15 | length 9.4
  Top Layer w0.3: 5J1.3 -18.3,15.35 -18.3,16.6 -16.075,18.825 5U5.15
GND: 2R4.1 2R9.1 2U1.4 2U2.4 3C4.1 3C5.1 3D9.1 3D10.1 3D11.2 3D12.2 3P3.2 3U3.2 4D13.2 4U4.3 5C6.1 5J1.4 5J1.6 5J1.8 5P5.1 5R15.1 5SW1.1 5U5.5 6C7.1 6C8.1 6C9.1 6U6.1 6U6.2 6U6.3 6U6.4 6U6.7 7C10.1 7D14.3 7P6.1 7P6.4 7U7.5
  other v1: -5.6,2.5 14.4,2.5 -6.6,4.5 -4.6,4.5 3.4,4.5 5.4,4.5 17.4,4.5 -23.6,6.5 -19.6,6.5 -15.6,6.5 4.4,6.5 6.4,6.5 16.4,6.5 18.4,6.5 -16.6,8.5 -14.6,8.5 -6.6,8.5 5.4,8.5 7.4,8.5 15.4,8.5 17.4,8.5 19.4,8.5 21.4,8.5 23.4,8.5 -5.6,10.5 1.4,12.5 3.4,12.5 5.4,12.5 7.4,12.5 17.4,12.5 23.4,12.5 -15.6,14.5 2.4,14.5 4.4,14.5 16.4,14.5 -22.6,16.5 3.4,16.5 5.4,16.5 11.4,16.5 13.4,16.5 15.4,16.5 2.4,18.5 4.4,18.5 16.4,18.5 1.4,20.5 3.4,20.5 5.4,20.5 9.4,20.5 21.4,20.5 23.4,20.5 -15.6,22.5 -13.6,22.5 0.4,22.5 2.4,22.5 4.4,22.5 8.4,22.5 10.4,22.5 -16.6,24.5 -14.6,24.5 -12.6,24.5 -8.6,24.5 -6.6,24.5 -4.6,24.5 -2.6,24.5 1.4,24.5 3.4,24.5 5.4,24.5 -17.6,26.5 -15.6,26.5 -13.6,26.5 -3.6,26.5 8.4,26.5 16.4,26.5 -20.6,28.5 -18.6,28.5 -16.6,28.5 -14.6,28.5 -8.6,28.5 -6.6,28.5 -4.6,28.5 -2.6,28.5 3.4,28.5 7.4,28.5 9.4,28.5 15.4,28.5 21.4,28.5 23.4,28.5 8.4,30.5 10.4,30.5 9.4,32.5 13.4,32.5 15.4,32.5 21.4,32.5 23.4,32.5 8.4,34.5 10.4,34.5 14.4,34.5 23.4,36.5 8.4,38.5 19.4,40.5 21.4,40.5 23.4,40.5 18.4,42.5 20.4,42.5 22.4,42.5 8.4,46.5 9.4,48.5 13.4,48.5 15.4,48.5 17.4,48.5
  other v2: -7.6,14.6 -6.3,18.9 -10.2,21.7
KEY: 5J1.2 5U5.3 | length 24
  Top Layer w0.3: v2(-10.3,17.3) -9.875,16.875 5U5.3
  Bottom Layer w0.3: 5J1.2 -23.27,8.77 -22.6,8.1 -19.7,8.1 -16.9,10.9 -16.9,16.6 -16.2,17.3 v2(-10.3,17.3)
LED: 5J1.1 5U5.16 | length 11.2
  Top Layer w0.3: 5J1.1 -17.7,13.41 -17.7,16.351 -15.876,18.175 5U5.16
Net2C1_1: 2C1.1 2R2.2 2U1.3 | length 7.4
  Top Layer w0.3: 2R2.2 -4.3,37.3 -3.8,36.8 2C1.1 -1.27,36.47 2U1.3
Net2C1_2: 2C1.2 2R1.2 2U1.1 | length 7.4
  Top Layer w0.3: 2U1.1 1.27,36.47 2C1.2 3.8,36.8 4.3,37.3 2R1.2
Net2C2_1: 2C2.1 2D3.1 2D5.2 2R8.2 2U2.1 | length 20.1
  Top Layer w0.3: 2D5.2 -22.2,41.45 -21.5,40.75 2D3.1 -14.65,40.7 -13,40.7 -12.5,40.2 -12.5,37.9 -11.3,36.7 -10.2,36.7 -9.73,36.23 2U2.1@-9.73,35.125 ; 2U2.1 2U2.1@-9.73,35.125 ; 2C2.1 -8.25,35.25 -9.605,35.25 2U2.1@-9.73,35.125
Net2C2_2: 2C2.2 2D6.1 2Q1.2 | length 12
  Top Layer w0.3: 2D6.1 -18.15,33.75 2Q1.2 -15.7,32.6 -15.15,32.05 -8.25,32.05 2C2.2
Net2C3_1: 2C3.1 2D3.3 2R7.2 | length 13
  Top Layer w0.3: 2C3.1@-14.6,43.9 -12.887,42.187 -11.087,42.187 -10.7,41.8 -10.7,38.7 -10.25,38.25 2D3.3
  Top Layer w0.6: 2R7.2 -14.9,43.6 -14.6,43.9 2C3.1
Net2C3_2: 2C3.2 2D3.4 2R6.2 | length 5.8
  Top Layer w0.3: 2R6.2 -8.7,43.5 2D3.4
  Top Layer w0.6: 2C3.2 -11.4,43.9 -11.1,43.6 2R6.2
Net2D1_1: 2D1.1 2R1.1 | length 7.7
  Top Layer w0.3: 2D1.1 -1.35,44.25 -0.7,43.6 -0.7,42.1 0.65,40.75 0.65,39.65 2R1.1
Net2D1_2: 2D1.2 2R2.1 | length 3.8
  Top Layer w0.3: 2D1.2 -2.25,41.75 -1.55,41.05 -1.55,39.65 2R2.1
Net2D1_3: 2D1.3 2P1.1 | length 8
  Top Layer w0.3: 2P1.1 0.7,44.195 0.7,42.4 1.35,41.75 2D1.3
Net2D1_4: 2D1.4 2P1.2 | length 3
  Top Layer w0.3: 2P1.2 3,45.705 2D1.4
Net2D2_1: 2D2.1 2R3.2 2U1.5 | length 4
  Top Layer w0.3: v2(-1,25.7) 2R3.2 2U1.5
  Bottom Layer w0.3: v2(-1,25.7) 2D2.1
Net2D2_2: 2D2.2 2R4.2 | length 1.7
  Bottom Layer w0.3: 2D2.2 2R4.2
Net2D3_2: 2D3.2 2D5.1 2D6.2 2Q1.1 2R8.1 | length 14.8
  Top Layer w0.3: 2D6.2 2D5.1 -22.2,37.55 -21.5,38.25 2D3.2 -14.7,36.35 -15.4,35.65 2Q1.1
Net2D4_1: 2D4.1 2R5.2 2U2.5 | length 4
  Top Layer w0.3: v2(-12,25.7) 2R5.2 2U2.5
  Bottom Layer w0.3: v2(-12,25.7) 2D4.1
Net2D4_2: 2D4.2 2R9.2 | length 1.7
  Bottom Layer w0.3: 2D4.2 2R9.2
Net2P2_1: 2P2.1 2R7.1 | length 2.3
  Top Layer w0.6: 2R7.1 2P2.1
Net2P2_2: 2P2.2 2R6.1 | length 2.3
  Top Layer w0.6: 2P2.2 2R6.1
Net2Q1_3: 2Q1.3 2U2.3 | length 1.8
  Top Layer w0.3: 2Q1.3 -12.395,34.7 -12.27,34.575 2U2.3
Net2R3_1: 2R3.1 5U5.2 | length 20.5
  Top Layer w0.3: 5U5.2 -10.525,16.225 -11.7,17.4 -11.7,21.6 -10.7,22.6 -1.3,22.6 2R3.1
Net2R5_1: 2R5.1 5U5.17 | length 8.8
  Top Layer w0.3: 5U5.17 -12.775,17.525 -12.3,18 -12.3,22.6 2R5.1
Net3D8_1: 3D8.1 3P3.1 | length 3
  Top Layer w1: 3D8.1 18.848,37.952 21.753,37.952 3P3.1
Net3D11_1: 3D11.1 3R10.1 | length 1.7
  Top Layer w0.6: 3R10.1 3D11.1
Net3D12_1: 3D12.1 3R11.1 | length 1.7
  Top Layer w0.6: 3R11.1 3D12.1
Net4D13_1: 4D13.1 4R13.1 | length 1.6
  Bottom Layer w0.3: 4D13.1 4R13.1
Net4P4_1: 4P4.1 4U4.2 | length 3.4
  Top Layer w1: 4P4.1 11.098,46.798 11.098,43.402 4U4.2
Net4R12_1: 4R12.1 4R13.2 4U4.1 | length 5.9
  Top Layer w0.3: v2(13.4,41.4) 4U4.1
  Bottom Layer w0.3: 4R12.1 4R13.2 v2(13.4,41.4)
Net4R12_2: 4R12.2 5U5.7 | length 37.1
  Top Layer w0.3: v2(-10.3,20) -9.775,19.475 5U5.7
  Bottom Layer w0.3: v2(-10.3,20) -8.8,21.5 5.7,21.5 11.6,27.4 4R12.2
Net5U5_1: 5U5.1 6C9.2 6R17.1 6U6.5 | length 8.5
  Top Layer w0.3: 6C9.2 -10.6,10.4 -10.895,10.695 6U6.5 -10.895,13.605 6R17.1 -10.6,15 -10.025,15.575 5U5.1
Net5U5_8: 5U5.8 7R20.1 | length 5.2
  Top Layer w0.3: 5U5.8 -4.925,20.125 -4.5,19.7 7R20.1
Net5U5_20: 5U5.20 6C8.2 6R16.1 6U6.6 | length 11.1
  Top Layer w0.3: 5U5.20 -12.975,15.575 -12.4,15 6R16.1 -12.165,13.665 6U6.6 -12.165,9.565 -11.2,8.6 6C8.2
Net7R18_2: 7R18.2 7U7.1 | length 1.7
  Top Layer w0.3: 7R18.2 0.805,16.895 7U7.1
Net7R19_1: 7R19.1 7U7.7 | length 2.2
  Top Layer w0.6: 7U7.7 -0.465,7.965 7R19.1
Net7R20_2: 7R20.2 7U7.2 7U7.3 | length 8.4
  Top Layer w0.3: 7R20.2 -4.5,14 -4.2,13.7 -2,13.7 -1.735,13.965 7U7.3
  Top Layer w0.6: 7U7.3 7U7.2
Net7R22_1: 7R22.1 7U7.6 | length 2.2
  Top Layer w0.6: 7R22.1 -1.735,7.965 7U7.6
Net7R23_2: 7R23.2 7U7.4 | length 1.7
  Top Layer w0.3: 7U7.4 -3.005,16.895 7R23.2
NRST: 5SW1.2 5U5.6 | length 3.6
  Top Layer w0.3: v2(-10.3,18.8) -10.275,18.825 5U5.6
  Bottom Layer w0.3: v2(-10.3,18.8) 5SW1.2
SWCLK: 5P5.3 5R14.1 5R15.2 5U5.19 | length 18.5
  Top Layer w0.3: v2(-16.025,16.225) 5U5.19 ; 5R15.2 v2(-13.35,2.7) 5R14.1
  Bottom Layer w0.3: v2(-16.025,16.225) -13.35,13.55 5P5.3 v2(-13.35,2.7)
SWDIO: 5P5.2 5U5.18 | length 13.6
  Top Layer w0.3: 5U5.18 -12.575,16.875 v2(-12.1,16.4)
  Bottom Layer w0.3: 5P5.2 v2(-12.1,16.4)
TMCLK: 5J1.13 5U5.11 | length 8
  Top Layer w0.3: 5J1.13 -16.535,21.425 5U5.11
TMDIO: 5J1.11 5U5.12 | length 7.2
  Top Layer w0.3: 5J1.11 -18.425,20.775 5U5.12
USRT_N: 5U5.9 7R23.1 | length 9.7
  Top Layer w0.3: 5U5.9 -8.477,20.798 -7.624,20.798 -7.622,20.8 -2.776,20.8 -1.4,19.424 -1.4,19.176 -1.576,19 -2.7,19 7R23.1
USRT_P: 5U5.10 7R18.1 | length 10.7
  Top Layer w0.3: 5U5.10 -8.477,21.402 -7.624,21.402 -7.622,21.4 -2.527,21.4 -0.8,19.673 -0.8,19.176 -0.624,19 0.5,19 7R18.1
pads on no net: 5P5.MP1 5P5.MP2

## Polygon pours and split planes (outlines as drawn)
GND on Bottom Layer "NONET_L-01_P-001" (solid, remove dead copper, pour order 1): -25,50 25,50 25,0 -25,0
GND on Top Layer "NONET_L-01_P-001" (solid, remove dead copper, pour order 2): -25,50 25,50 25,0 -25,0

## Keep-outs
Keep-Out Layer:
  lines w0.2: -25,0 25,0 25,50 -25,50 -25,0
  lines w1: -14,31 3,31 ; -6,36 -6,48.5 ; 6,36 6,48.5

## Other copper
Top Layer:
  pour cut-out: 7,50 7,31 6,30 -25,30 -25,50
Bottom Layer:
  pour cut-out: 7,50 7,31 6,30 -25,30 -25,50

## Silkscreen, mask and mechanical layers (free items; w line width, h text height)
Bottom Overlay:
  circle w0.426: c14,20.8 r0.766
  lines w0.168: 11.959,27.42 cw(c14.961,27.824) 14.556,30.826 ; 13.787,25.015 cw(c13.383,28.017) 10.381,27.612 ; 14.233,29.227 cw(c14.638,26.226) 17.64,26.63 ; 16.316,25.251 cw(c14.613,24.612) 15.251,22.909 ; 10.381,27.612 ccw(c10.807,27.612) 10.807,27.187 ; 10.381,27.612 ccw(c14,27.612) 14,23.993 ; 10.807,27.187 cw(c10.807,23.993) 14,23.993 ; 10.807,27.187 ccw(c10.807,30.38) 14,30.38 ; 10.807,27.187 cw(c14.426,27.187) 14.426,30.806 ccw(c14.426,30.38) 14,30.38 ; 14,23.993 ccw(c17.193,20.8) 14,17.607 ccw(c10.807,20.8) 14,23.993 ; 14,30.38 ccw(c17.193,30.38) 17.193,27.187 cw(c17.193,26.761) 17.619,26.761 ccw(c14,26.761) 14,30.38 ; 15.251,22.909 ccw(c14.829,24.848) 16.767,25.271 ccw(c16.549,25.035) 16.313,25.254 cw(c15.673,25.883) 14.775,25.898 cw(c16.087,25.886) 17.38,26.103 cw(c14.719,25.57) 15.251,22.909 ; 7.401,20.161 cw(c10.062,17.5) 12.723,20.161 cw(c12.19,20.481) 11.871,19.948 ccw(c9.529,17.82) 7.401,20.161 ; 7.401,21.013 cw(c10.062,18.352) 12.723,21.013 cw(c12.19,21.332) 11.871,20.8 ccw(c9.529,18.671) 7.401,21.013 ; 7.401,21.864 cw(c10.062,19.203) 12.723,21.864 cw(c12.19,22.184) 11.871,21.652 ccw(c9.529,19.523) 7.401,21.864 ; 7.613,19.097 cw(c10.275,16.436) 12.936,19.097 cw(c12.403,19.416) 12.084,18.884 ccw(c9.742,16.755) 7.613,19.097 ; 9.736,15.523 cw(c11.079,15.618) 12.222,16.331 ccw(c12.227,15.149) 11.046,15.143 ccw(c12.863,15.205) 12.925,13.387 cw(c12.399,16.049) 9.736,15.523 ; 9.742,16.542 cw(c12.297,15.478) 13.361,18.033 cw(c12.127,18.118) 12.041,16.883 ccw(c11.062,15.563) 9.742,16.542 ; 11.481,15.628 cw(c12.15,15.38) 12.399,16.049 cw(c12.209,15.395) 12.863,15.205 ccw(c11.961,14.725) 11.481,15.628 ; 14.639,18.033 ccw(c15.873,18.118) 15.959,16.883 cw(c16.938,15.563) 18.258,16.542 ccw(c15.703,15.478) 14.639,18.033 ; 15.064,19.097 ccw(c15.597,19.416) 15.916,18.884 cw(c18.258,16.755) 20.387,19.097 ccw(c17.725,16.436) 15.064,19.097 ; 15.075,13.387 ccw(c15.601,16.049) 18.264,15.523 ccw(c16.921,15.618) 15.778,16.331 cw(c15.773,15.149) 16.954,15.143 cw(c15.137,15.205) 15.075,13.387 ; 15.137,15.205 cw(c15.791,15.395) 15.601,16.049 cw(c15.85,15.38) 16.519,15.628 ccw(c16.039,14.725) 15.137,15.205 ; 15.277,20.161 ccw(c15.81,20.481) 16.129,19.948 cw(c18.471,17.82) 20.599,20.161 ccw(c17.938,17.5) 15.277,20.161 ; 15.277,21.013 ccw(c15.81,21.332) 16.129,20.8 cw(c18.471,18.671) 20.599,21.013 ccw(c17.938,18.352) 15.277,21.013 ; 15.277,21.864 ccw(c15.81,22.184) 16.129,21.652 cw(c18.471,19.523) 20.599,21.864 ccw(c17.938,19.203) 15.277,21.864
  lines w0.503: 13.83,17.82 ccw(c10.849,20.8) 13.83,23.78 ; 14.17,17.82 cw(c17.151,20.8) 14.17,23.78
  text "RADMEHR" at 17.763,11.916 h1.67
  text "MORADKHANI" at 19.09,10.763 h1.67

## Text inside footprints (layer, text, board x,y; h text height)
5J1: Top Overlay "1" at -20.9,7.8 h0.6; Top Overlay "2" at -23.5,7.8 h0.6; Top Overlay "14" at -23.7,27.6 h0.6; Top Overlay "13" at -21.1,27.6 h0.6